# Altium PCB 开关电源2_0.PcbDoc
Units mil, origin at the board's own origin, x right, y up, seen from the top; angles counter-clockwise.
Board outline 1421.02 x 2361.22 mil, 2 copper layers (Top Layer, Bottom Layer); 59 components, 27 nets, 140 pads, 157 vias.
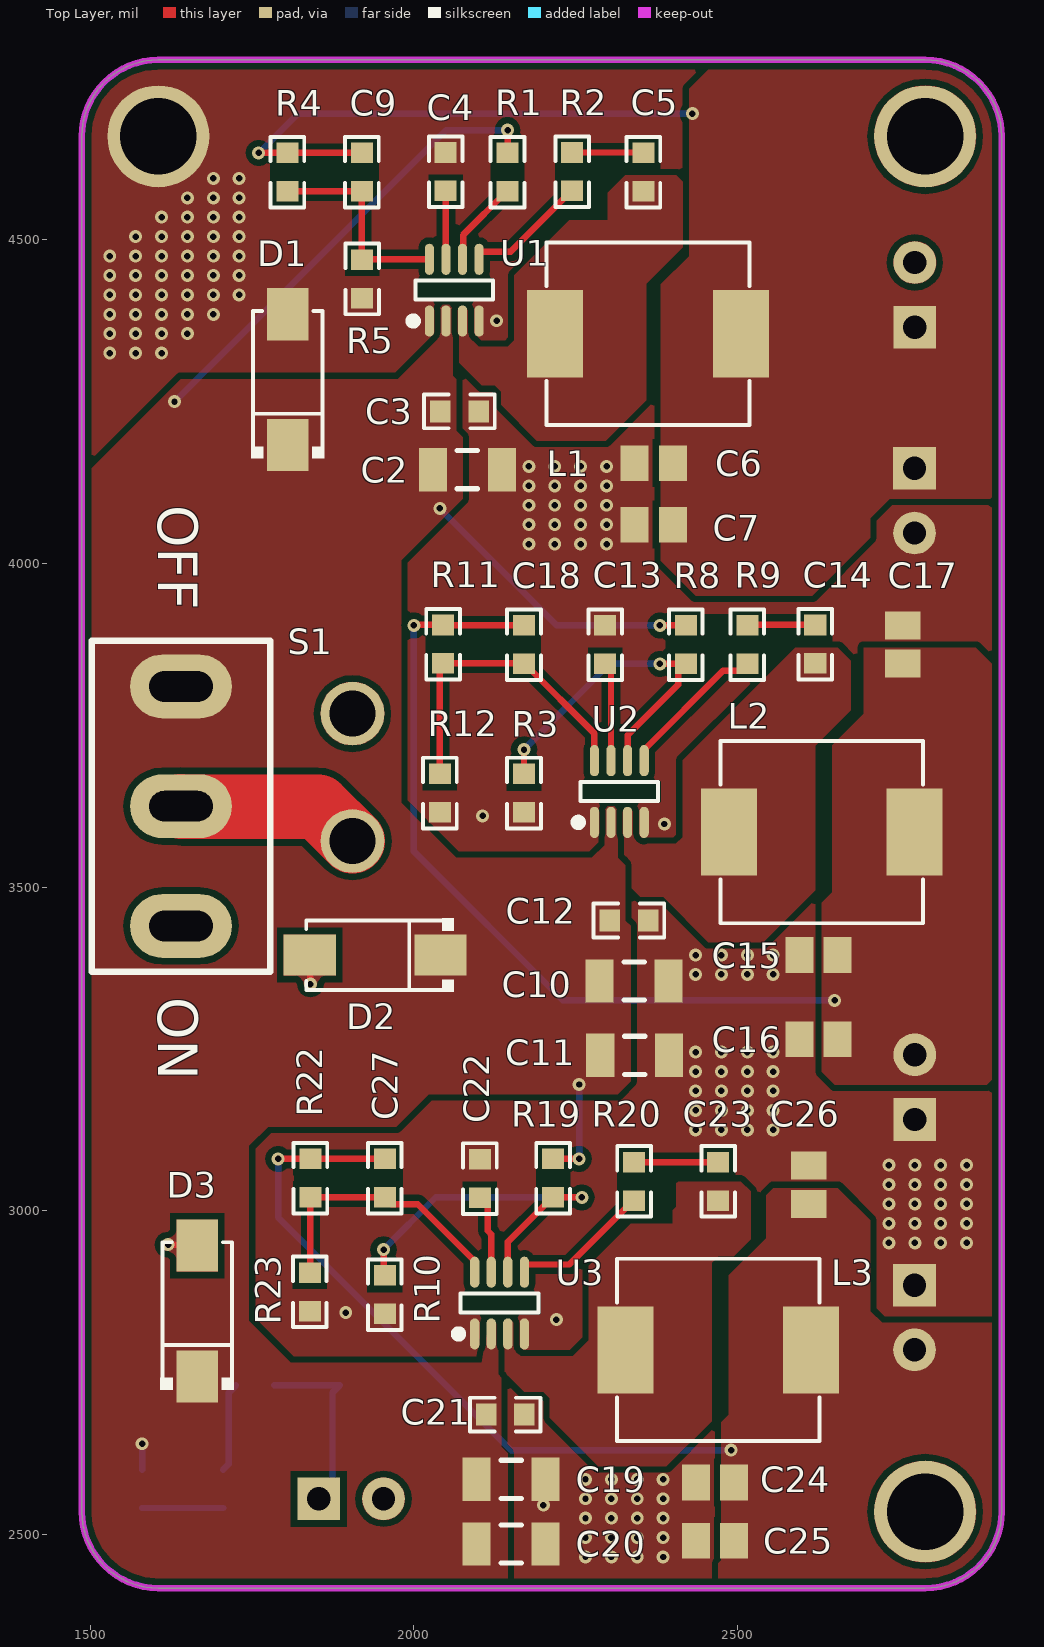
[diagram p0: Top Layer view]
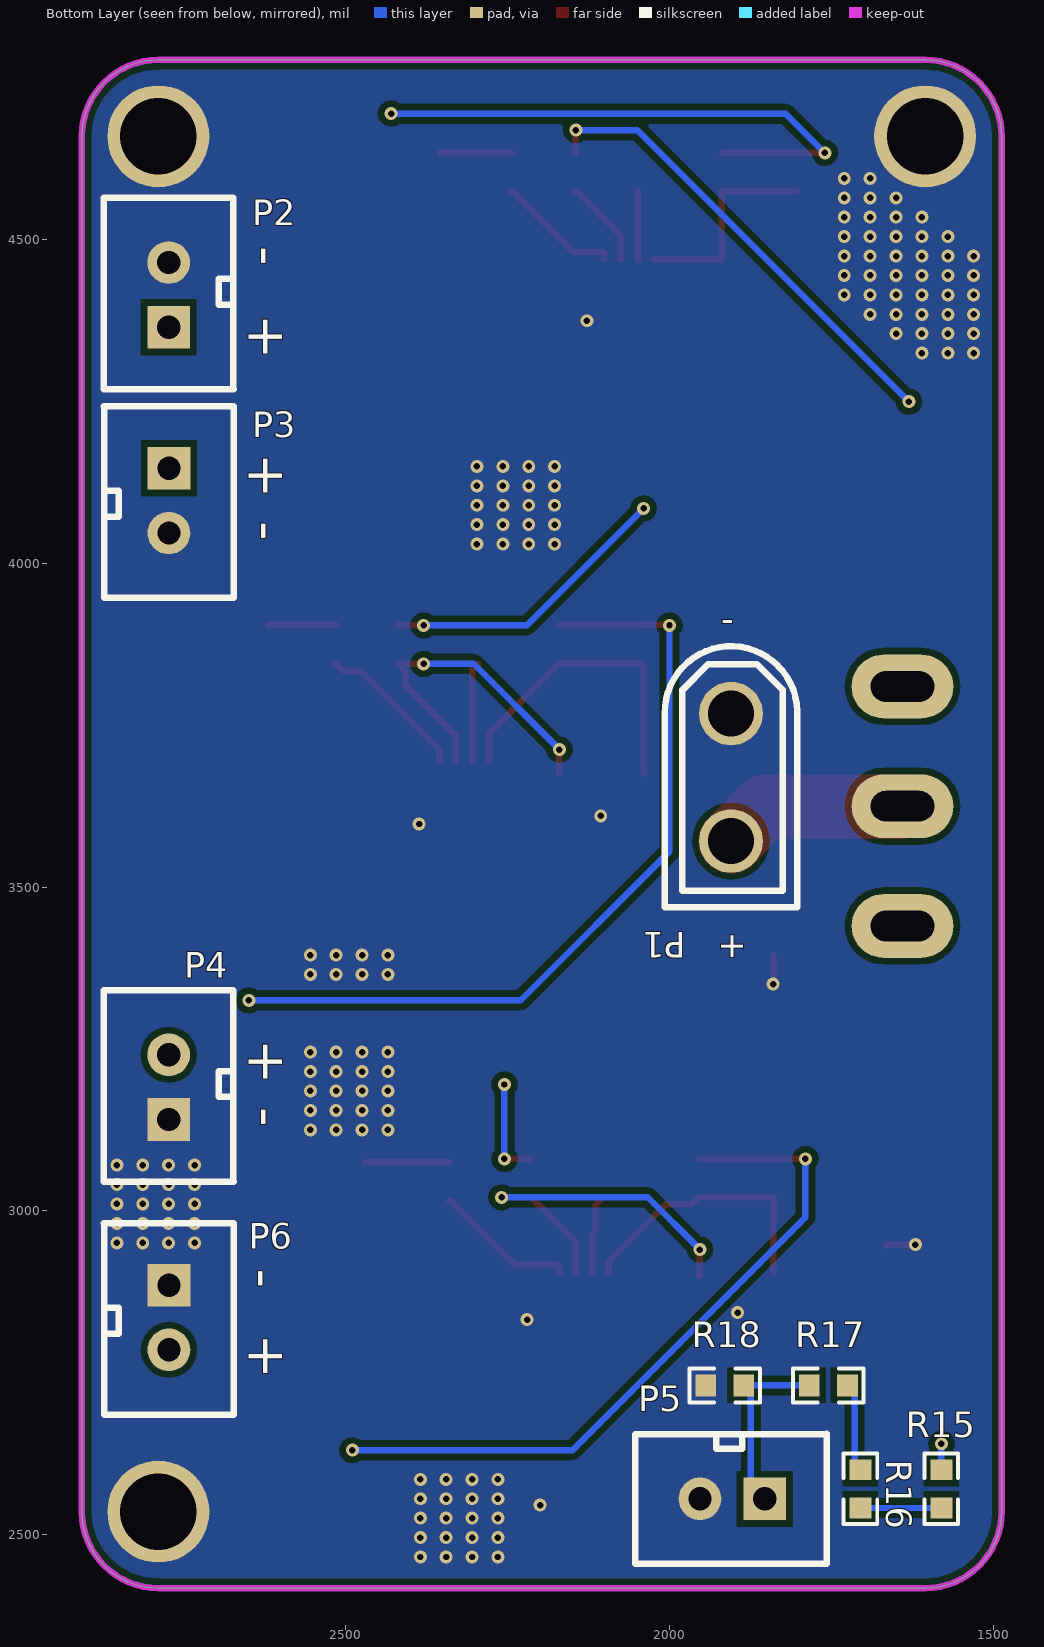
[diagram p1: Bottom Layer view, seen from below]

## Layer stack, top to bottom
Top Solder: solder mask 0.4, Solder Resist, Dk 3.5
Top Layer: signal copper 1.4
Dielectric 1: dielectric 12.6, FR-4, Dk 4.8
Bottom Layer: signal copper 1.4
Bottom Solder: solder mask 0.4, Solder Resist, Dk 3.5

## Board outline
1605,2416.89 cw(c1605,2535) 1486.89,2535 1486.89,4660 cw(c1605,4660) 1605,4778.11 2789.8,4778.11 cw(c2789.8,4660) 2907.91,4660 2907.91,2535 cw(c2789.8,2535) 2789.8,2416.89

## Design rules (kind name [scope] priority, off if disabled: settings)
Clearance [All] p1: gap=10 ignorepadtopadclearanceinfootprint=FALSE except(0: Arc-Hole Track-Hole SMDPad-Hole THPad-Hole Via-Hole Fill-Hole Poly-Hole Region-Hole Text-Hole)
PlaneConnect [All] p1: planeconnectstyle=Direct reliefexpansion=20 reliefentries=4 reliefconductorwidth=10 reliefairgap=10
PolygonConnect [All] p1: connectstyle=Direct reliefconductorwidth=10 reliefentries=4 polygonreliefangle="90 Angle" airgapwidth=10
RoutingVias [All] p1: holewidth=10 width=20 viastyle="Through Hole" minholewidth=10 minwidth=20 maxholewidth=28 maxwidth=50
SolderMaskExpansion [All] p1: expansion=4
Width [All] p1: maxlimit=100 minlimit=10 preferedwidth=10
29 further rules are at their usual default settings.

## Classes and differential pairs
component class Designator: C19 C20 C21 C22 C23 C24 C25 C26 C27 D3 L3 P6 R10 R19 R20 R22 R23 U3

## Components (designator, comment, footprint, x,y, rotation, side; value= is the part's Value field where it differs from the comment)
C2 "Cap" C1206 2082.5,4145 r180 top value=22UF
C3 "Cap" R0603 2106.31,4229.13 r180 top value=0.1uF
C4 "Cap" R0603 2054.81,4641.36 r270 top value=0.1uF
C5 "Cap" R0603 2360.4,4640.67 r270 top value=0.1uF
C6 "Cap" C0805 2370.47,4155 r0 top value=22uF
C7 "Cap" C0805 2370.47,4060 r0 top value=22uF
C9 "Cap" R0603 1913.66,4568.64 r90 top value=33pF
C10 "Cap" C1206 2340,3355 r180 top value=22UF
C11 "Cap" C1206 2340.94,3240 r180 top value=22UF
C12 "Cap" R0603 2368.17,3442.52 r180 top value=1uF
C13 "Cap" R0603 2301.34,3910.67 r270 top value=1uF
C14 "Cap" R0603 2625.87,3911.36 r270 top value=0.1uF
C15 "Cap" C0805 2625,3395 r0 top value=22uF
C16 "Cap" C0805 2625,3265 r0 top value=22uF
C17 "Cap" C0805 2755,3875 r270 top value=22uF
C18 "Cap" R0603 2164.13,3838.64 r90 top value=220pF
C19 "Cap" C1206 2150,2585 r180 top value=22uF
C20 "Cap" C1206 2150,2485 r180 top value=22UF
C21 "Cap" R0603 2177,2679.13 r180 top value=1uF
C22 "Cap" R0603 2107.72,3085.67 r270 top value=1uF
C23 "Cap" R0603 2475.87,3081.36 r270 top value=0.1uF
C24 "Cap" C0805 2465,2580 r0 top value=22uF
C25 "Cap" C0805 2465,2490 r0 top value=22uF
C26 "Cap" C0805 2610,3040 r270 top value=22uF
C27 "Cap" R0603 1949.13,3014.33 r90 top value=220pF
D1 "SMAJ12A_C220440" SMA_L4.4-W2.8-LS5.4-RD 1805,4284 r90 top
D2 "SMAJ12A_C220440" SMA_L4.4-W2.8-LS5.4-RD 1940,3395 r180 top
D3 "SMAJ12A_C220440" SMA_L4.4-W2.8-LS5.4-RD 1665,2845 r90 top
L1 "Inductor" IND-SMD_L7.8-W7.0_MAPM0630F 2361.57,4355 r180 top value=4.7uH
L2 "Inductor" IND-SMD_L7.8-W7.0_MAPM0630F 2630,3585 r180 top value=3.3uH
L3 "Inductor" IND-SMD_L7.8-W7.0_MAPM0630F 2470,2785 r180 top value=3.3uH
P1 "Header 2" CONN-TH_XT30UPB-M 1905,3690 r270 bottom
P2 "Header 2" XH2.54-2A 2773.62,4417.05 r90 bottom
P3 "Header 2" XH2.54-2A 2773.62,4095 r270 bottom
P4 "Header 2" XH2.54-2A 2773.62,3192.95 r90 bottom
P5 "Header 2" XH2.54-2A 1905,2555 r0 bottom
P6 "Header 2" XH2.54-2A 2773.62,2832.95 r270 bottom
R1 "Res1" R0603 2150.4,4640.67 r270 top value=100K
R2 "Res1" R0603 2238.66,4569.33 r90 top value=10R
R3 "Res1" R0603 2164.13,3609.33 r90 top value=130K
R4 "Res1" R0603 1798.66,4568.64 r90 top value=40.2K
R5 "Res1" R0603 1914.13,4403.64 r90 top value=5.49K
R8 "Res1" R0603 2425.87,3910.67 r270 top value=300K
R9 "Res1" R0603 2509.13,3838.64 r90 top value=10R
R10 "Res1" R0603 1949.13,2834.33 r90 top value=130K
R11 "Res1" R0603 2039.13,3839.33 r90 top value=100K
R12 "Res1" R0603 2034.13,3609.33 r90 top value=8.87K
R15 "Res1" R0603 1585.87,2534.33 r90 bottom value=10K
R16 "Res1" R0603 1699.13,2606.36 r270 bottom value=10K
R17 "Res1" R0603 1790.67,2735.87 r180 bottom value=10K
R18 "Res1" R0603 1950.67,2735.87 r180 bottom value=10K
R19 "Res1" R0603 2220.87,3086.36 r270 top value=300K
R20 "Res1" R0603 2334.13,3009.33 r90 top value=10R
R22 "Res1" R0603 1834.13,3014.33 r90 top value=100K
R23 "Res1" R0603 1833.13,2838.64 r90 top value=8.87K
S1 "SW-SPDT" "PCBComponent_1 - duplicate" 1640,3625 r90 top
U1 "MP2225GJ-Z" TSOT-23-8_L2.9-W1.6-P0.65-LS2.8-BR 15037.52,22887.21 r270 top
U2 "MP2225GJ-Z" TSOT-23-8_L2.9-W1.6-P0.65-LS2.8-BR 15292.52,22112.57 r270 top
U3 "MP2225GJ-Z" TSOT-23-8_L2.9-W1.6-P0.65-LS2.8-BR 15107.52,21322.21 r270 top

## Footprints (in the part's own frame and the unit in brackets; to place one, negate y for a bottom-side part, rotate by r counter-clockwise, add the part's x,y. Pads: shape width x height; smd on the part's side, far side on the other; paste and mask are expansions set on the pad)
C0805 [mm] "Chip Capacitor, Body 2.0x1.3mm, IPC High Density"
  rect 1.1x1.4 smd: 1(-0.75,0) 2(0.75,0)
  body extent -1.1,-0.72 1.1,0.72, height 1.4
C1206 [mm] "Chip Capacitor, Body 3.2x1.6mm, IPC High Density"
  rect 1.1x1.7 smd: 1(-1.35,0) 2(1.35,0)
  silkscreen extent -0.4,-0.75 0.4,0.75, body extent -1.7,-0.9 1.7,0.9, height 1.3
CONN-TH_XT30UPB-M [mm]
  round 2.5 hole 1.8: 1(-1.982,0) 2(3.018,0)
  silkscreen extent -4.63,-2.6 5.62,2.6
IND-SMD_L7.8-W7.0_MAPM0630F [mm]
  rect 2.194x3.42 smd: 1(3.643,0) 2(-3.643,0)
  silkscreen extent -3.98,-3.58 3.98,3.58
"PCBComponent_1 - duplicate" [mm]
  oval 2.5x4 hole 1.2 slot 2.5 at 90 deg: 1(-4.7,0) 2(0,0) 3(4.7,0)
  silkscreen extent -6.5,-3.5 6.5,3.5
R0603 [mil]
  rect 31.75x34.02 smd: 1(6.36,-5.87) 2(65.67,-5.87)
  silkscreen extent -19,-32 91,20
SMA_L4.4-W2.8-LS5.4-RD [mm]
  rect 2.046x1.62 smd: 1(-2.565,0) 2(2.565,0)
  silkscreen extent -3.08,-1.44 2.7,1.44
TSOT-23-8_L2.9-W1.6-P0.65-LS2.8-BR [mil]
  oval 48.11x14.33 smd: 1(18512.57,-13013.7) 2(18512.57,-12988.11) 3(18512.57,-12962.52) 4(18512.57,-12936.92) 5(18417.21,-12936.92) 6(18417.21,-12962.52) 7(18417.21,-12988.11) 8(18417.21,-13013.7)
  silkscreen extent 18450,-13045 18518,-12915
XH2.54-2A [mil]
  rect 66x66 hole 36: 1(-52.05,0.2)
  round 66 hole 36: 2(47.95,0.2)
  silkscreen extent -148,-100 148,100

## Part data
C2 C3 C4 C5 C6 C7 C9 C10 C11 C12 C13 C14 C15 C16 C17 C18 C19 C20 C21 C22 C23 C24 C25 C26 C27: "Capacitor", LatestRevisionDate=17-Jul-2002, LatestRevisionNote="Re-released for DXP Platform.", PackageDescription="Radial Cap, Thru-Hole; 2 Leads; 0.3 in Pin Spacing", PackageReference=RAD-0.3, Published=8-Jun-2000, Publisher="Altium Limited"
P1 P2 P3 P4 P5 P6: "Header, 2-Pin", LatestRevisionDate=17-Jul-2002, LatestRevisionNote="Re-released for DXP Platform.", Publisher="Altium Limited"
R1 R2 R3 R4 R5 R8 R9 R10 R11 R12 R15 R16 R17 R18 R19 R20 R22 R23: "Resistor", LatestRevisionDate=17-Jul-2002, LatestRevisionNote="Re-released for DXP Platform.", PackageDescription="Axial Device, Thru-Hole; 2 Leads; 0.3 in Pin Spacing", PackageReference=AXIAL-0.3, Published=8-Jun-2000, Publisher="Altium Limited"
S1: "SPDT Subminiature Toggle Switch, Right Angle Mounting, Vertical Actuation", ComponentLink1Description="Manufacturer Link", ComponentLink1URL=http://www.apem.com, DatasheetVersion=05-Dec-2000, LatestRevisionDate=17-Dec-2003, LatestRevisionNote="Schematic revised, PCB Footprint replaced.", PackageDescription="Switch; 4 Leads", PackageReference=TL36WW15050, Published=24-Mar-1999, Publisher="Altium Limited"
L1 L2 L3: Code_IEC=1005, Code_JEITA=0402, LatestRevisionDate=29-May-2009, LatestRevisionNote="IPC-7351 Footprint Added.", PackageDescription="Chip Inductor", PackageReference=0402-A, Published=8-Jun-2000, Publisher="Altium Limited"

## Free pads (board coordinates)
  round 157.48 hole 118.11: 1(2789.8,2535) 2(2789.8,4660) 3(1605,4660)

## Via types
v1: diameter 20, hole 10, Top Layer to Bottom Layer, 157 vias

## Nets (pads, with @x,y where several pads share a name; then routed paths per layer and width w, separated by ;. In a path a pad name is that pad's centre, name@x,y a point inside that pad or via, vN(x,y) a via of type N, cw(c..) or ccw(c..) an arc to the next point about the centre after c; other vN are vias at no path point)
5V: C6.2 C7.2 C9.2 L1.2 P2.1 P3.1 R4.2 | length 854.7
  Top Layer w10: v1(1760,4634.31) C9.2
  Bottom Layer w10: v1(1760,4634.31) 1820.69,4695 v1(2430,4695)
7V4_1: C15.2 C16.2 C17.2 C18.2 L2.2 P4.2 R11.2 | length 1265.2
  Top Layer w10: v1(2000,3904.31) 2000.69,3905 R11.2 2045.69,3904.31 C18.2
  Bottom Layer w10: v1(2000,3904.31) 2000,3555 2230,3325 v1(2650,3325)
7V4_2: C24.2 C25.2 C26.2 C27.2 L3.2 P6.2 R22.2 | length 1104.1
  Top Layer w10: v1(1790,3080) R22.2 C27.2
  Bottom Layer w10: v1(1790,3080) 1790,2990 2150,2630 v1(2490,2630)
12V: C2.2 C3.2 C10.2 C11.2 C12.2 C19.2 C20.2 C21.2 D1.1 D2.1 D3.1 R1.1 R8.1 R15.2 R19.1 S1.3 U1.2 U2.2 U3.2 | length 1373.4
  Top Layer w10: R1.1 v1(2144.53,4669.53) ; R19.1 v1(2255,3080) ; v1(2380,3904.31) R8.1
  Bottom Layer w10: R15.2 v1(1580,2640) ; v1(1630,4250) 2049.53,4669.53 v1(2144.53,4669.53) ; v1(2040,4085) 2220.69,3904.31 v1(2380,3904.31) ; v1(2255,3080) v1(2255,3195)
12V_IN: P1.2 S1.2 | length 287.3
  Top Layer w100: S1.2 1640.79,3624.21 1851.97,3624.21 P1.2
GND: C2.1 C3.1 C4.1 C6.1 C7.1 C10.1 C11.1 C12.1 C13.1 C15.1 C16.1 C17.1 C19.1 C20.1 C21.1 C22.1 C24.1 C25.1 C26.1 D1.2 D2.2 D3.2 P1.1 P2.2 P3.2 P4.1 P5.2 P6.1 pad.1 pad.2 pad.3 R3.1 R5.1 R10.1 R12.1 R18.1 R23.1 U1.1 U1.4 U2.1 U2.4 U3.1 U3.4 | length 91
  Top Layer w10: v1(1620,2947.5) 1663.5,2947.5 D3.2 ; D2.2 1840,3393.99 v1(1840,3350)
  other v1: 2265,2465 2305,2465 2345,2465 2385,2465 2265,2495 2305,2495 2345,2495 2385,2495 2265,2525 2305,2525 2345,2525 2385,2525 2200,2545 2265,2555 2305,2555 2345,2555 2385,2555 2265,2585 2305,2585 2345,2585 2385,2585 2220,2831.68 1894.6,2842.7 2733.82,2950.47 2773.82,2950.47 2813.82,2950.47 2853.82,2950.47 2733.82,2980.47 2773.82,2980.47 2813.82,2980.47 2853.82,2980.47 2733.82,3010.47 2773.82,3010.47 2813.82,3010.47 2853.82,3010.47 2733.82,3040.47 2773.82,3040.47 2813.82,3040.47 2853.82,3040.47 2733.82,3070.47 2773.82,3070.47 2813.82,3070.47 2853.82,3070.47 2435,3125 2475,3125 2515,3125 2555,3125 2435,3155 2475,3155 2515,3155 2555,3155 2435,3185 2475,3185 2515,3185 2555,3185 2435,3215 2475,3215 2515,3215 2555,3215 2435,3245 2475,3245 2515,3245 2555,3245 2435,3365 2475,3365 2515,3365 2555,3365 2435,3395 2475,3395 2515,3395 2555,3395 2386.97,3597.5 2106.2,3610 2177.5,4030 2217.5,4030 2257.5,4030 2297.5,4030 2177.5,4060 2217.5,4060 2257.5,4060 2297.5,4060 2177.5,4090 2217.5,4090 2257.5,4090 2297.5,4090 2177.5,4120 2217.5,4120 2257.5,4120 2297.5,4120 2177.5,4150 2217.5,4150 2257.5,4150 2297.5,4150 1530,4325 1570,4325 1610,4325 1530,4355 1570,4355 1610,4355 1650,4355 2127.79,4375 1530,4385 1570,4385 1610,4385 1650,4385 1690,4385 1530,4415 1570,4415 1610,4415 1650,4415 1690,4415 1730,4415 1530,4445 1570,4445 1610,4445 1650,4445 1690,4445 1730,4445 1530,4475 1570,4475 1610,4475 1650,4475 1690,4475 1730,4475 1570,4505 1610,4505 1650,4505 1690,4505 1730,4505 1610,4535 1650,4535 1690,4535 1730,4535 1650,4565 1690,4565 1730,4565 1690,4595 1730,4595
NetC4_2: C4.2 U1.7 | length 105.9
  Top Layer w10: C4.2 2049.41,4575.22 U1.7
NetC5_1: C5.1 R2.2 | length 110.3
  Top Layer w10: R2.2 2353.84,4635 C5.1
NetC5_2: C5.2 L1.1 U1.3
NetC9_1: C9.1 R4.1 R5.2 U1.8 | length 325
  Top Layer w10: R4.1 C9.1 1919.53,4469.78 R5.2 1920.69,4470 U1.8
NetC13_2: C13.2 U2.7 | length 153.3
  Top Layer w10: C13.2 2304.4,3836.07 U2.7
NetC14_1: C14.1 R9.2 | length 105.3
  Top Layer w10: R9.2 2515.69,3905 C14.1
NetC14_2: C14.2 L2.1 U2.3
NetC18_1: C18.1 R11.1 R12.2 U2.8 | length 493.4
  Top Layer w10: R12.2 2040,3840.69 R11.1 2169.31,3845.69 C18.1 2171.13,3845 2278.81,3737.32 U2.8
NetC22_2: C22.2 U3.7 | length 122.9
  Top Layer w10: C22.2 2102.98,3020 2113.86,3009.12 2113.86,2968.87 2119.41,2963.32 U3.7
NetC23_1: C23.1 R20.2 | length 130
  Top Layer w10: R20.2 C23.1
NetC23_2: C23.2 L3.1 U3.3
NetC27_1: C27.1 R22.1 R23.2 U3.8 | length 428.4
  Top Layer w10: R23.2 1840,2905.31 R22.1 C27.1 1965.88,3009.81 2005.9,3009.81 2093.82,2921.89 U3.8
NetP5_1: P5.1 R17.1 R18.2 | length 289.2
  Bottom Layer w10: R17.1 R18.2 1874.12,2719.12 1874.12,2575.98 P5.1
NetR1_2: R1.2 U1.6 | length 134.5
  Top Layer w10: U1.6 2075.83,4470.83 2075.83,4507.43 2143.4,4575 R1.2
NetR2_1: R2.1 U1.5 | length 193.5
  Top Layer w10: U1.5 2100.6,4479.9 2102.6,4481.9 2149.6,4481.9 2243.4,4575.69 R2.1
NetR3_2: R3.2 R8.2 U2.6 | length 528.8
  Top Layer w10: R3.2 v1(2170,3712.5) ; U2.6 2329.99,3734.77 2407.99,3812.77 2407.99,3834.12 R8.2@2418.87,3845 ; v1(2380,3845) R8.2@2418.87,3845 ; R8.2 R8.2@2418.87,3845
  Bottom Layer w10: v1(2170,3712.5) 2302.5,3845 v1(2380,3845)
NetR9_1: R9.1 U2.5 | length 231.3
  Top Layer w10: U2.5 2355.59,3712.26 2477.46,3834.12 2504.12,3834.12 R9.1
NetR10_2: R10.2 R19.2 U3.6 | length 570.3
  Top Layer w10: v1(1952.95,2940) 1952.95,2902.05 R10.2 ; U3.6 2145,2951.82 2213.87,3020.69 v1(2259.31,3020.69)
  Bottom Layer w10: v1(1952.95,2940) 2033.64,3020.69 v1(2259.31,3020.69)
NetR15_1: R15.1 R16.2 | length 125
  Bottom Layer w10: R15.1 R16.2
NetR16_1: R16.1 R17.2 | length 138.3
  Bottom Layer w10: R16.1 1714.12,2609.12 1714.12,2719.12 R17.2
NetR20_1: R20.1 U3.5 | length 221
  Top Layer w10: U3.5 2170.6,2914.9 2172.6,2916.9 2240.08,2916.9 2338.87,3015.69 R20.1
pads on no net: S1.1

## Polygon pours and split planes (outlines as drawn)
GND on Top Layer "GND_L01_P037" (solid, remove dead copper, pour order 37): 1605,2416.89 cw(c1605,2535) 1486.89,2535 1486.89,4660 cw(c1605,4660) 1605,4778.11 2789.8,4778.11 cw(c2789.8,4660) 2907.91,4660 2907.91,2535 cw(c2789.8,2535) 2789.8,2416.89
NetC23_2 on Top Layer "NETC23_2_L01_P008" (solid, remove dead copper, pour order 8): 2130,2830 2155,2830 2155,2785 2165,2775 2245,2775 2270,2800 2270,2915 2335,2980 2440,2980 2460,2960 2460,2675 2390,2605 2285,2605 2210,2680 2210,2710 2200,2720 2170,2720 2130,2760
12V on Top Layer "12V_L01_P032" (solid, remove dead copper, pour order 32): 1980,3630 2065,3545 1952.95,3432.95 1952.95,3250 2022.95,3180 1972.95,3130 1775,3130 1745,3100 1745,2830 1860,2715 2065,2715 2065,2423.74 2058.15,2416.89 1530.9,2416.89 1400,2547.79 1420,2567.79 1420,4015 1980,4015
5V on Top Layer "5V_L01_P028" (solid, remove dead copper, pour order 28): 2470,4778.11 2425,4733.11 2425,4475 2381.54,4431.54 2381.54,4003.94 2435.47,3950 2615,3950 2705,4040 2705,4070 2735,4100 2890,4100 2907.91,4117.91 2907.91,4757.09 2885,4780 2883.11,4778.11
no net on Top Layer "NONET_L01_P026" (solid, remove dead copper, pour order 26): 2450,4778.11
NetC5_2 on Top Layer "NETC5_2_L01_P022" (solid, remove dead copper, pour order 22): 2065,4395 2085,4395 2085,4350 2100,4335 2145,4335 2155,4345 2155,4445 2240,4530 2299.58,4530 2299.58,4573 2326.57,4600 2405,4600 2415,4590 2415,4488.43 2358.77,4432.2 2358.77,4252.2 2296.57,4190 2190,4190 2135,4245 2135,4265 2125,4275 2105,4275 2065,4315
7V4_1 on Top Layer "7V4_1_L01_P018" (solid, remove dead copper, pour order 18): 2695,3870 2867.91,3870 2907.91,3830 2907.91,3217.91 2885,3195 2650,3195 2630,3215 2630,3475.91 2645.98,3491.88 2645.98,3719.02 2695,3768.04
NetC14_2 on Top Layer "NETC14_2_L01_P016" (solid, remove dead copper, pour order 16): 2589.31,3870 2655,3870 2675,3850 2675,3773.04 2616.96,3715 2555.24,3715 2534.82,3694.57 2534.82,3815.5
NetC14_2 on Top Layer "NETC14_2_L01_P014" (solid, remove dead copper, pour order 14): 2340,3620 2340,3580 2353.36,3566.64 2404.61,3566.64 2415,3577.04 2415,3695.69 2542.5,3823.19 2620,3823.19 2620,3495 2540,3415 2455,3415 2385,3485 2349.83,3485 2330.79,3504.04 2330.79,3544.21 2320,3555 2320,3620
7V4_2 on Top Layer "7V4_2_L01_P012" (solid, remove dead copper, pour order 12): 2655,3035 2705,2985 2705,2845 2723.46,2826.54 2800.96,2826.54 2820,2826.54 2839.04,2826.54 2907.91,2826.54 2907.91,2416.89 2470,2416.89 2470,2455 2475,2460 2475,2673.43 2486.57,2685 2486.57,2900 2543.9,2957.33 2543.9,3023.9 2555,3035
NetC23_2 on Top Layer "NETC23_2_L01_P010" (solid, remove dead copper, pour order 10): 2407.99,3045 2505,3045 2520,3030 2520,2955.88 2494.12,2930 2470,2930 2460,2920 2410,2920 2400,2930 2400,3037.01
12V on Top Layer "12V_L01_P006" (solid, remove dead copper, pour order 6): 2116.52,2830 2130,2830 2130,2747.15 2135,2742.15 2135,2635 2145,2625 2145,2416.89 2073.11,2416.89 2049.42,2440.58 2049.42,2655 1525,2655 1486.89,2693.11 1486.89,2804.71 1512.18,2830 1745,2830 1810,2765 2104.41,2765
12V on Top Layer "12V_L01_P004" (solid, remove dead copper, pour order 4): 2295,3625 2314.21,3625 2315,3624.21 2315,3545 2326.57,3533.43 2326.57,3448.39 2335,3439.96 2335,3200 2315,3180 2022.95,3180 1952.95,3250 1952.95,3432.95 2065,3545 2275,3545 2295,3565
12V on Top Layer "12V_L01_P002" (solid, remove dead copper, pour order 2): 2040,4400 2060,4400 2060,4290 2065,4285 2065,4205 2075,4195 2075,4100 1795,3820 1795,3690 1490,3690 1490,4135 1640,4285 1975,4285 2040,4350
GND on Bottom Layer "GND_L02_P038" (solid, remove dead copper, pour order 38): 1605,2416.89 cw(c1605,2535) 1486.89,2535 1486.89,4660 cw(c1605,4660) 1605,4778.11 2789.8,4778.11 cw(c2789.8,4660) 2907.91,4660 2907.91,2535 cw(c2789.8,2535) 2789.8,2416.89

## Keep-outs
Keep-Out Layer:
  the board outline again, w10

## Other copper
Top Layer:
  pour cut-out: 2117.52,4608.43 2171.54,4608.43 2171.54,4600.88 2117.52,4600.88
  pour cut-out: 2217.52,4609.12 2217.52,4601.57 2271.54,4601.57 2271.54,4549.81 2239.15,4549.81 2232.09,4542.75 2235.42,4539.42 2288.61,4539.42 2290.16,4540.97 2290.16,4578 2322.35,4610.2 2327.52,4610.2 2327.52,4619.71 2217.79,4619.71 2217.5,4620
  pour cut-out: 2388.58,3922.63 2596.97,3922.63 2600,3919.6 2592.99,3912.6 2592.99,3880.2 2585.09,3880.2 2534.81,3829.92 2410.08,3829.92 2388.58,3851.42
  pour cut-out: 2187.99,3054.12 2242.01,3054.12 2242.01,3046.57 2187.99,3046.57
  pour cut-out: 2312.99,3049.12 2367.01,3049.12 2367.01,3059.71 2405.04,3059.71 2405.53,3059.21 2405.53,3005.92 2389.8,2990.2 2389.39,2990.61 2333.82,2990.61 2312.99,3011.44
  pour cut-out: 1814.6,3072.69 1983.61,3072.69 1983.61,3033.9 1814.6,3033.9
  pour cut-out: 2017.75,3893.79 2197.01,3893.79 2197.01,3855 2017.75,3855
  pour cut-out: 1777.52,4625.88 1946.54,4625.88 1946.54,4587.08 1777.52,4587.08
  pour cut-out: 1777.52,4617.3
  pour cut-out: 1777.52,4617.3
  pour cut-out: 2070.48,2840.49 2070.79,2838.91 2194.47,2838.91 2196.17,2840.6 2196.17,2871.45 2192.98,2874.64 2192.24,2873.91 2070.48,2873.91
  pour cut-out: 2256.01,3631.59 2256.32,3630 2380,3630 2381.69,3631.7 2381.69,3662.55 2378.51,3665.74 2377.77,3665 2256.01,3665
  pour cut-out: 2000,4406.59 2000.31,4405 2123.99,4405 2125.69,4406.69 2125.69,4437.55 2122.5,4440.73 2121.77,4440 2000,4440

## Silkscreen, mask and mechanical layers (free items; w line width, h text height)
Top Overlay:
  text "OFF" at 1605,4090 h60.63 r270
  text "ON" at 1605,3330 h60.63 r270
Bottom Overlay:
  text "-" at 2650,4490 h60.63 r90
  text "+" at 2650,4385 h60.63 r90
  text "+" at 2650,4170 h60.63 r90
  text "-" at 2650,4065 h60.63 r90
  text "+" at 2650,3265 h60.63 r90
  text "-" at 2650,3160 h60.63 r90
  text "-" at 2655,2910 h60.63 r90
  text "+" at 2650,2810 h60.63 r90
Mechanical 1:
  lines w10: 1486.89,2535 ccw(c1605,2535) 1605,2416.89 2789.8,2416.89 ccw(c2789.8,2535) 2907.91,2535 ; 1486.89,2535 1486.89,4660 cw(c1605,4660) 1605,4778.11 2789.8,4778.11 cw(c2789.8,4660) 2907.91,4660 2907.91,2535 ; 1486.89,2535 1486.89,2535 ; 2907.91,2535 2907.91,2535

## Text inside footprints (layer, text, board x,y; h text height)
P1: Bottom Overlay "-" at 1919.99,3894.93 h39.37; Bottom Overlay "+" at 1919.99,3431.19 h39.37 r90